# Altium PCB sm.PcbDoc
Units mm, origin at the board's own origin, x right, y up, seen from the top; angles counter-clockwise.
Board outline 113 x 128 mm, 2 copper layers (Top Layer, Bottom Layer); 43 components, 38 nets, 170 pads, 22 vias.
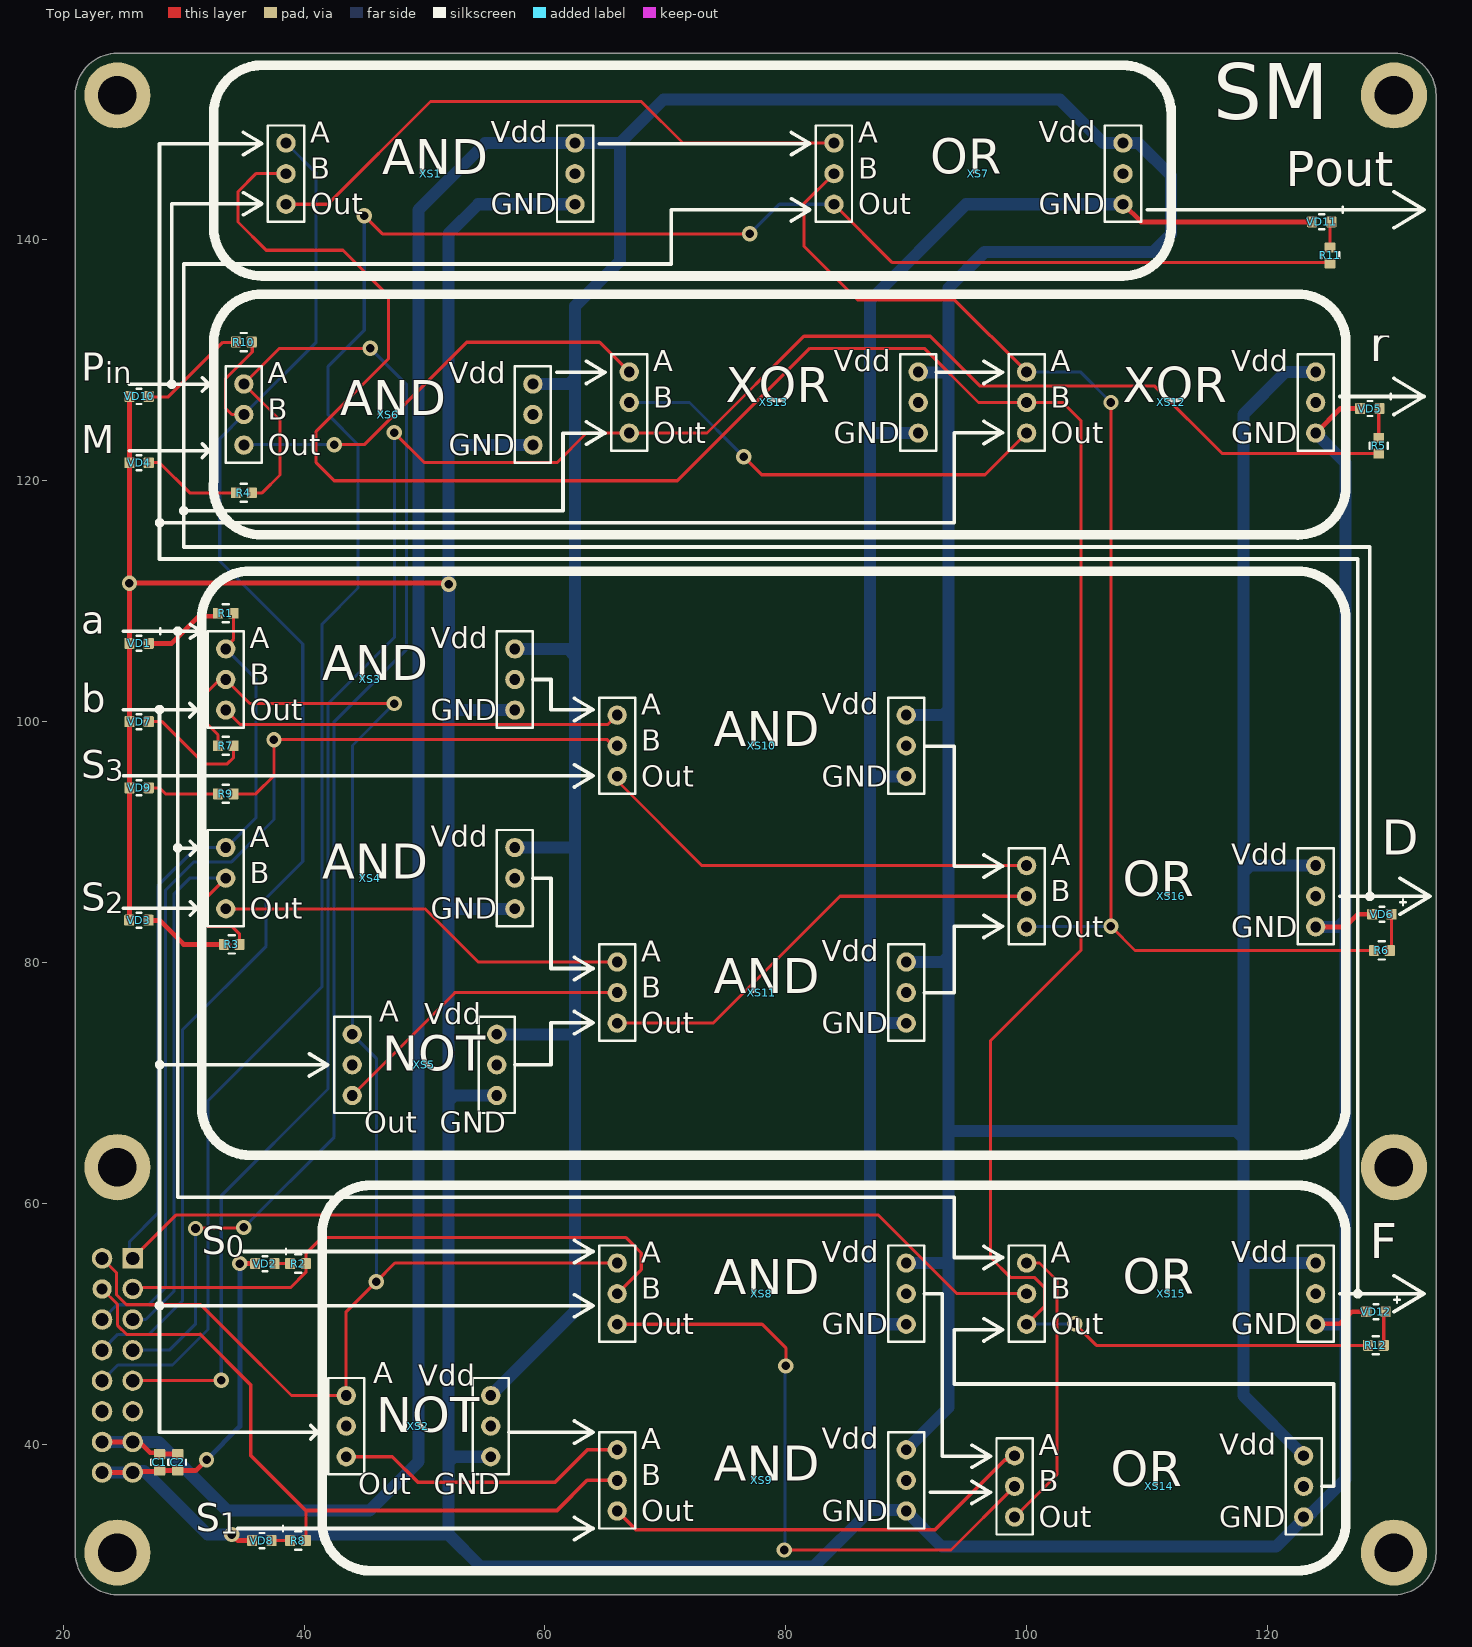
[diagram p0: Top Layer view]
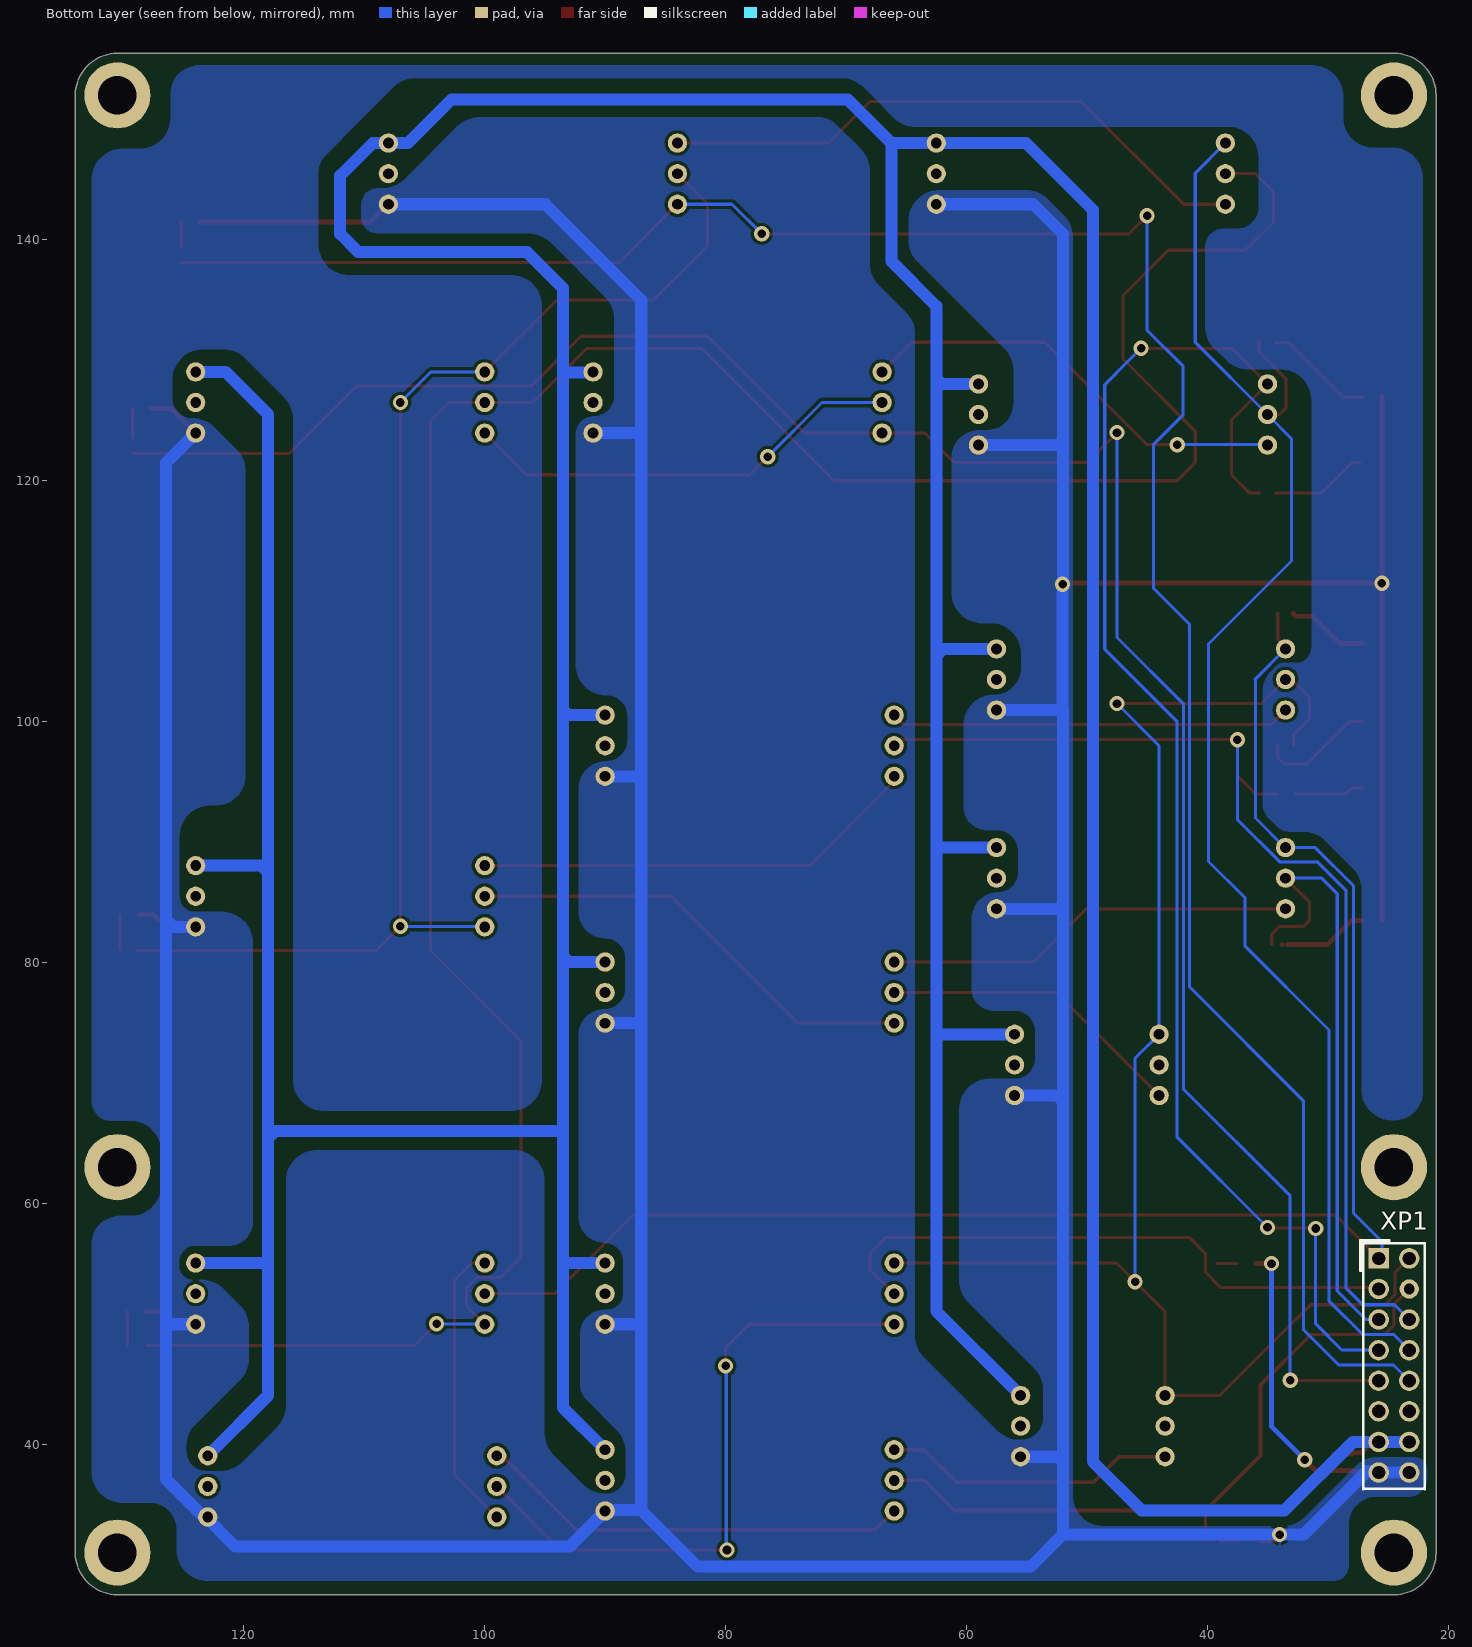
[diagram p1: Bottom Layer view, seen from below]

## Layer stack, top to bottom
Top Solder: solder mask 0.0102, Solder Resist, Dk 3.5
Top Layer: signal copper 0.0356
Dielectric 1: dielectric 0.32, FR-4, Dk 4.8
Bottom Layer: signal copper 0.0356
Bottom Solder: solder mask 0.0102, Solder Resist, Dk 3.5

## Board outline
24.5,27.5 cw(c24.5,31) 21,31 21,152 cw(c24.5,152) 24.5,155.5 120,155.5 130.5,155.5 cw(c130.5,152) 134,152 134,31 cw(c130.5,31) 130.5,27.5

## Design rules (kind name [scope] priority, off if disabled: settings)
Clearance [All] p1: gap=0.254 ignorepadtopadclearanceinfootprint=FALSE except(0: Arc-Hole Track-Hole SMDPad-Hole THPad-Hole Via-Hole Fill-Hole Poly-Hole Region-Hole Text-Hole)
ComponentClearance [All] p1: gap=0 collisioncheckmode=3 verticalgap=0 showdistances=TRUE
PolygonConnect [All] p1: connectstyle=Relief reliefconductorwidth=0.254 reliefentries=4 polygonreliefangle="90 Angle" airgapwidth=0.254
RoutingVias [All] p1: holewidth=0.711 width=1.27 viastyle="Through Hole" minholewidth=0.711 minwidth=1.27 maxholewidth=0.711 maxwidth=1.27
SolderMaskExpansion [All] p1: expansion=0.102 istentingtop=FALSE
Width [All] p1: maxlimit=5 minlimit=0.2 preferedwidth=0.4
29 further rules are at their usual default settings.

## Components (designator, comment, footprint, x,y, rotation, side; value= is the part's Value field where it differs from the comment)
C1 "10 мкФ ±* * * 0805, *" K10-79_1.6_0.8(0603) 28,38.5 r90 top value="10 мк"
C2 "1 мкФ ±* * * 0603, *" K10-79_1.6_0.8(0603) 29.5,38.5 r90 top value="1 мк"
R1 "1 кОм ±* 0603, *" P1-12-0.1(0603) 33.5,109 r180 top value="1 к"
R2 "1 кОм ±* 0603, *" P1-12-0.1(0603) 39.5,55 r180 top value="1 к"
R3 "1 кОм ±* 0603, *" P1-12-0.1(0603) 34,81.5 r180 top value="1 к"
R4 "1 кОм ±* 0603, *" P1-12-0.1(0603) 35,119 r180 top value="1 к"
R5 "1 кОм ±* 0603, *" P1-12-0.1(0603) 129.235,122.911 r90 top value="1 к"
R6 "1 кОм ±* 0603, *" P1-12-0.1(0603) 129.5,81 r0 top value="1 к"
R7 "1 кОм ±* 0603, *" P1-12-0.1(0603) 33.5,98 r0 top value="1 к"
R8 "1 кОм ±* 0603, *" P1-12-0.1(0603) 39.5,32 r180 top value="1 к"
R9 "1 кОм ±* 0603, *" P1-12-0.1(0603) 33.5,94 r180 top value="1 к"
R10 "1 кОм ±* 0603, *" P1-12-0.1(0603) 35.001,131.521 r180 top value="1 к"
R11 "1 кОм ±* 0603, *" P1-12-0.1(0603) 125.197,138.709 r90 top value="1 к"
R12 "1 кОм ±* 0603, *" P1-12-0.1(0603) 129,48.209 r0 top value="1 к"
VD1 "VD - Светодиод" "LED 0603" 26.3,106.5 r180 top
VD2 "VD - Светодиод" "LED 0603" 36.75,55 r180 top
VD3 "VD - Светодиод" "LED 0603" 26.289,83.515 r180 top
VD4 "VD - Светодиод" "LED 0603" 26.3,121.5 r180 top
VD5 "VD - Светодиод" "LED 0603" 128.5,126 r180 top
VD6 "VD - Светодиод" "LED 0603" 129.5,84 r180 top
VD7 "VD - Светодиод" "LED 0603" 26.3,100 r180 top
VD8 "VD - Светодиод" "LED 0603" 36.5,32 r180 top
VD9 "VD - Светодиод" "LED 0603" 26.3,94.5 r180 top
VD10 "VD - Светодиод" "LED 0603" 26.3,127 r180 top
VD11 "VD - Светодиод" "LED 0603" 124.5,141.5 r180 top
VD12 "VD - Светодиод" "LED 0603" 129,51 r180 top
XP1 "XP - Вилка - х8" PLD-16Norm 24.5,44 r270 bottom
XS1 "Модуль AND" модуль_AND 38.5,145.5 r0 top
XS2 "Модуль NOT" модуль_NOT 43.5,41.5 r0 top
XS3 "Модуль AND" модуль_AND 33.5,103.5 r0 top
XS4 "Модуль AND" модуль_AND 33.5,87 r0 top
XS5 "Модуль NOT" модуль_NOT 44,71.5 r0 top
XS6 "Модуль AND" модуль_AND 35,125.5 r0 top
XS7 "Модуль OR" модуль_OR 84,145.5 r0 top
XS8 "Модуль AND" модуль_AND 66,52.5 r0 top
XS9 "Модуль AND" модуль_AND 66,37 r0 top
XS10 "Модуль AND" модуль_AND 66,98 r0 top
XS11 "Модуль AND" модуль_AND 66,77.5 r0 top
XS12 "Модуль XOR" модуль_XOR 100,126.5 r0 top
XS13 "Модуль XOR" модуль_XOR 67,126.5 r0 top
XS14 "Модуль OR" модуль_OR 99,36.5 r0 top
XS15 "Модуль OR" модуль_OR 100,52.5 r0 top
XS16 "Модуль OR" модуль_OR 100,85.5 r0 top

## Footprints (in the part's own frame and the unit in brackets; to place one, negate y for a bottom-side part, rotate by r counter-clockwise, add the part's x,y. Pads: shape width x height; smd on the part's side, far side on the other; paste and mask are expansions set on the pad)
K10-79_1.6_0.8(0603) [mm]
  rrect20% 0.85x0.95 smd mask+0.05: 1(-0.675,0) 2(0.675,0)
  silkscreen extent -0.2,-0.7 0.2,0.7, body extent -0.8,-0.42 0.84,0.43, height 0.41
"LED 0603" [mm]
  rrect20% 0.85x0.9 smd mask+0.05: 1(-0.8,0) 2(0.8,0)
  silkscreen extent -2,-1.25 0.2,0.63, body extent -0.8,-0.4 0.8,0.4, height 0.6
P1-12-0.1(0603) [mm]
  rrect20% 0.85x0.9 smd mask+0.05: 1(-0.65,0) 2(0.65,0)
  Top Layer pour cut-out: -0.225,0.4 0.225,0.4 0.225,-0.4 -0.225,-0.4
  silkscreen extent -0.25,-0.75 0.25,0.75, body extent -0.85,-0.4 0.85,0.4, height 0.56
PLD-16Norm [mm]
  rect 1.7x1.7 hole 1.1: 1(-11.43,-1.27)
  round 1.7 hole 1.1: 2(-11.43,1.27) 3(-8.89,-1.27) 5(-6.35,-1.27) 6(-6.35,1.27) 7(-3.81,-1.27) 8(-3.81,1.27) 9(-1.27,-1.27) 10(-1.27,1.27) 11(1.27,-1.27) 12(1.27,1.27) 13(3.81,-1.27) 14(3.81,1.27) 15(6.35,-1.27) 16(6.35,1.27)
  round 1.6 hole 0.9: 4(-8.89,1.27)
  silkscreen extent -12.95,-2.79 7.75,2.54
модуль_AND [mm]
  round 1.6 hole 0.9: 1(0,2.54) 2(0,0) 3(0,-2.54) 4(24,2.54) 5(24,0) 6(24,-2.54)
  silkscreen extent -1.5,-4 25.5,4, body extent -1.34,-3.91 25.2,3.71, height 8.55
модуль_NOT [mm]
  round 1.6 hole 0.9: 1(0,2.54) 2(0,0) 3(0,-2.54) 4(12,2.54) 5(12,0) 6(12,-2.54)
  silkscreen extent -1.5,-4 13.5,4, body extent -1.34,-3.91 13.2,3.71, height 8.55
модуль_OR [mm]
  round 1.6 hole 0.9: 1(0,2.54) 2(0,0) 3(0,-2.54) 4(24,2.54) 5(24,0) 6(24,-2.54)
  silkscreen extent -1.5,-4 25.5,4, body extent -1.34,-3.91 25.2,3.71, height 8.55
модуль_XOR [mm]
  round 1.6 hole 0.9: 1(0,2.54) 2(0,0) 3(0,-2.54) 4(24,2.54) 5(24,0) 6(24,-2.54)
  silkscreen extent -1.5,-4 25.5,4, body extent -1.34,-3.91 25.2,3.71, height 8.55

## Part data
C1: library part "C - Конденсатор", Package=0805
C2: library part "C - Конденсатор", Package=0603
R1 R2 R3 R4 R5 R6 R7 R8 R9 R10 R11 R12: library part "R - Резистор", Package=0603
VD1 VD2 VD3 VD4 VD5 VD6 VD7 VD8 VD9 VD10 VD11 VD12: Package=0603
XP1: library part "XP - розетка- х16", 9=r
XS1 XS3 XS4 XS6 XS8 XS9 XS10 XS11: "модуль AND", Package=Case-AND
XS2 XS5: "модуль NOT", Package=Case-NOT
XS7 XS14 XS15 XS16: "модуль OR", Package=Case-OR
XS12 XS13: "модуль XOR", Package=Case-XOR

## Free pads (board coordinates)
  round 5.5 hole 3.2: M1(24.5,31) M1(24.5,63) M1(24.5,152) M1(130.5,31) M1(130.5,63) M1(130.5,152)

## Via types
v1: diameter 1.27, hole 0.711, Top Layer to Bottom Layer, tented both sides, 22 vias

## Nets (pads, with @x,y where several pads share a name; then routed paths per layer and width w, separated by ;. In a path a pad name is that pad's centre, name@x,y a point inside that pad or via, vN(x,y) a via of type N, cw(c..) or ccw(c..) an arc to the next point about the centre after c; other vN are vias at no path point)
a: R1.1 XP1.1 XS3.1 XS4.1 XS15.2 | length 139.2
  Top Layer w0.254: XP1.1 29.356,59.016 87.694,59.016 94.21,52.5 XS15.2 ; XS3.1 33.5,106.2 34.15,106.85 R1.1
  Bottom Layer w0.254: XP1.1 25.5,55.7 25.5,56.818 27.864,59.182 27.864,86.364 31.04,89.54 XS4.1 33.54,89.54 36,92 36,103.5 36.02,103.52 XS3.1
b: R7.1 XP1.2 XS2.1 XS3.2 XS5.1 XS8.1 | length 128.6
  Top Layer w0.25: XP1.2 24.409,54.251 24.409,52.424 25.252,51.581 31.419,51.581 34,49
  Top Layer w0.254: R7.1 32.85,98.9 31.5,100.25 31.5,102 32.742,103.242 33.242,103.242 XS3.2 35.5,101.5 v1(47.5,101.5) ; 34,49 38.96,44.04 XS2.1 43.5,51 v1(46,53.5) 47.54,55.04 XS8.1
  Bottom Layer w0.254: XS5.1 46,72.04 v1(46,53.5) ; 44.018,74.87 44.018,98.018 v1(47.5,101.5)
D: R6.1 XS7.2 XS12.1 XS16.3 | length 111.1
  Top Layer w0.254: XS7.2 81.5,143 81.5,139.5 86,135 94.04,135 XS12.1 ; v1(107,126.5) v1(107,83) 109,81 R6.1
  Bottom Layer w0.254: XS16.3 100.04,83 v1(107,83) ; XS12.1 104.46,129.04 v1(107,126.5)
D_AND_G1: XS3.3 XS10.1 | length 33.3
  Top Layer w0.25: XS3.3 34.679,99.781 65.241,99.781 XS10.1
D_AND_G2: XS4.3 XS11.1 | length 34.3
  Top Layer w0.254: XS4.3 50.04,84.46 54.46,80.04 XS11.1
D_AND_G3: XS10.3 XS16.1 | length 37.3
  Top Layer w0.25: XS10.3 66,95.095 66.391,94.704 66.391,94.689 73.04,88.04 XS16.1
D_AND_G4: XS11.3 XS16.2 | length 38.4
  Top Layer w0.254: XS11.3 73.96,74.96 84.5,85.5 XS16.2
D_NOT_G1: XS5.3 XS11.2 | length 25.6
  Top Layer w0.254: XS5.3 52.5,77.46 52.5,77.5 XS11.2
F: R12.1 XS1.2 XS12.2 XS15.3 | length 220.3
  Top Layer w0.254: XS1.2 36,145.5 34.508,144.008 34.508,141.492 36.859,139.141 43.231,139.141 47,135.372 47,130.109 41,124.109 41,121.5 42.5,120 71,120 82,131 91.5,131 96,126.5 XS12.2 103,126.5 104.5,125 104.5,81 97,73.5 97,55.5 98.641,53.859 100.641,53.859 101.5,53 101.5,51.46 XS15.3 ; v1(104,50) 105.791,48.209 R12.1@128.077,48.209
  Bottom Layer w0.254: XS15.3 100.04,50 v1(104,50)
F_AND_G1: XS9.3 XS14.1 | length 36.2
  Top Layer w0.3: XS9.3 67.567,32.893 92.393,32.893 98.186,38.686 98.294,38.686 98.648,39.04 XS14.1
F_AND_G2: XS8.3 XS14.2 | length 52.9
  Top Layer w0.254: XS8.3 78.04,49.96 80,48 v1(80,46.5) ; v1(79.883,31.217) 93.717,31.217 XS14.2
  Bottom Layer w0.254: v1(79.883,31.217) 79.941,31.275 79.941,46.441 v1(80,46.5)
F_NOT_G1: XS2.3 XS9.1 | length 24.5
  Top Layer w0.3: XS2.3 47.324,38.96 49.428,36.855 60.855,36.855 63.54,39.54 XS9.1
F_OR_G1: XS14.3 XS15.1 | length 24.2
  Top Layer w0.254: XS14.3 102.514,37.474 102.514,53.594 101.068,55.04 XS15.1
GND: C1.1 C2.1 VD1.2 VD2.2 VD3.2 VD4.2 VD5.2 VD6.2 VD7.2 VD8.2 VD9.2 VD10.2 VD11.2 VD12.2 XP1.15 XP1.16 XS1.6 XS2.6 XS3.6 XS4.6 XS5.6 XS6.6 XS7.6 XS8.6 XS9.6 XS10.6 XS11.6 XS12.6 XS13.6 XS14.6 XS15.6 XS16.6 | length 619
  Top Layer w0.4: XP1.16 25.52,37.65 25.608,37.738 27.913,37.738 C1.1 C2.1 ; VD3.2 25.5,83.526 VD7.2 VD1.2 ; VD1.2@25.5,106.525 v1(25.5,111.5) ; VD10.2 v1(25.5,111.5) ; C2.1@29.511,37.814 31.007,37.814 v1(31.902,38.71) ; v1(34,32.5) 34.5,32 VD8.2 ; v1(34.671,55) VD2.2 ; v1(52.019,111.404) 51.924,111.5 v1(25.5,111.5) ; XS7.6 108.04,142.96 109.5,141.5 VD11.2 ; XS15.6 124.04,50 126,50 127,51 VD12.2 ; XS16.6 126.46,82.96 127.5,84 VD6.2 ; XS12.6 126.04,126 VD5.2
  Bottom Layer w0.4: v1(31.902,38.71) 34.671,41.478 v1(34.671,55)
  Bottom Layer w1: XP1.16 XP1.15 25.642,37.778 26.722,37.778 32,32.5 52,32.5 ; XS2.6 52.46,38.96 52,38.5 ; XS5.6 52.46,68.96 52,68.5 ; XS4.6 52.04,84.46 52,84.5 ; XS3.6 52.04,100.96 ; XS6.6 52.04,122.96 52,123 ; XS1.6 54.46,142.96 52,140.5 52,123 ; XS9.6@89.933,34.527 87,34.527 ; XS9.6 92.96,31.5 120.702,31.5 123.462,34.26 123.643,34.26 126.46,37.077 126.46,49.96 ; XS8.6 87.04,49.96 87,50 ; XS11.6 87.04,74.96 87,75 ; XS10.6 87.04,95.46 87,95.5 ; XS13.6 87.04,123.96 87,124 ; XS7.6 94.96,142.96 87,135 87,124 ; XS15.6 126.46,49.96 ; XS16.6 125.874,82.96 126.46,83.546 ; XS12.6 126.46,121.5 126.46,83.546 ; 52,32.5 54.672,29.828 82.301,29.828 87,34.527 ; 52,32.5 52,38.5 ; 52,38.5 52,68.5 ; 52,68.5 52,84.5 ; 52,84.5 52,101 52.04,100.96 ; 52,123 52,111.424 v1(52.019,111.404) 52.04,111.384 52.04,100.96 ; 87,34.527 87,50 ; 87,50 87,75 ; 87,75 87,95.5 ; 87,95.5 87,124 ; 126.46,49.96 126.46,83.546
M: R4.1 XP1.7 XS6.1 | length 121.4
  Top Layer w0.25: XS6.1 37.998,125.042 37.998,120.472 36.526,119 R4.1
  Top Layer w0.254: v1(30.988,57.912) 31.032,57.956 34.956,57.956 v1(35,58) ; XS6.1 37.96,131 v1(45.5,131)
  Bottom Layer w0.254: XP1.7 28.81,47.81 31,50 31,57.9 v1(30.988,57.912) ; v1(35,58) 42.5,65.5 42.5,100 48.516,106.016 48.516,127.984 46.5,130 v1(45.5,131)
NetR1_2: R1.2 VD1.1 | length 6.8
  Top Layer w0.4: VD1.1 29,106.5 31.25,108.75 32.625,108.75 32.85,108.975 R1.2
NetR2_2: R2.2 VD2.1 | length 1.7
  Top Layer w0.254: VD2.1 R2.2 R2.2@39.2,55
NetR3_2: R3.2 VD3.1 | length 7.1
  Top Layer w0.4: VD3.1 27.104,83.5 27.3,83.5 28,83.5 30,81.5 R3.2
NetR4_2: R4.2 VD4.1 | length 8.1
  Top Layer w0.25: VD4.1@27.3,121.5 28,121.5 30.5,119 R4.2
NetR5_2: R5.2 VD5.1 | length 2.5
  Top Layer w0.254: R5.2 129.235,125.935 VD5.1
NetR6_2: R6.2 VD6.1 | length 3.1
  Top Layer w0.254: R6.2 130.3,81.15 VD6.1
NetR7_2: R7.2 VD7.1 | length 9.7
  Top Layer w0.254: VD7.1 28.219,100 31.725,96.495 33.63,96.495 34.15,97.015 R7.2
NetR8_2: R8.2 VD8.1 | length 1.5
  Top Layer w0.25: VD8.1 R8.2
NetR9_2: R9.2 VD9.1 | length 5.8
  Top Layer w0.254: VD9.1 28,94.5 28.5,94 R9.2@32.7,94
NetR10_2: R10.2 VD10.1 | length 9.2
  Top Layer w0.25: VD10.1@27.064,126.936 28.689,126.936 33.253,131.5 34.33,131.5 R10.2
NetR11_2: R11.2 VD11.1 | length 2.2
  Top Layer w0.254: R11.2 125.197,141.397 VD11.1
NetR12_2: R12.2 VD12.1 | length 2.9
  Top Layer w0.254: R12.2 129.65,50.85 VD12.1
P_AND_G1: XS1.3 XS7.1 | length 50.5
  Top Layer w0.254: XS1.3 41.96,142.96 50.5,151.5 68,151.5 71.46,148.04 XS7.1
Pin: R10.1 XP1.8 XS1.1 XS6.2 | length 124
  Top Layer w0.254: XS6.2 34,125.5 33.477,126.023 33.477,128.477 35.7,130.7 35.7,131.472 R10.1
  Bottom Layer w0.254: XP1.8 24.539,49.119 27.119,49.119 29.912,51.912 29.912,56.626 29.896,56.642 29.896,74.396 36.855,81.355 36.855,85.355 39.893,88.393 39.893,106.451 33,113.344 33,123.5 XS6.2 41,131.5 41,145.54 XS1.1
Pout: R11.1 XP1.10 XS7.3 | length 194.3
  Top Layer w0.254: v1(45,142) 46.5,140.5 v1(77,140.5) ; XS7.3 88.85,138.11 125.146,138.11 R11.1
  Bottom Layer w0.254: XP1.10 24.539,46.579 29.079,46.579 32.029,49.529 32.029,68.529 41.484,77.984 41.484,108.097 44.484,111.097 44.484,123 42,125.484 42,129.5 45,132.5 v1(45,142) ; v1(77,140.5) 79.46,142.96 XS7.3
r: R5.1 XP1.9 XS13.3 | length 183.2
  Top Layer w0.254: XP1.9 25.792,45.292 33.1,45.292 v1(33.122,45.314) ; v1(47.5,124) 50,121.5 61,121.5 63.46,123.96 XS13.3 73.46,123.96 81.5,132 92,132 96.141,127.859 110.641,127.859 116.239,122.261 R5.1
  Bottom Layer w0.254: v1(33.122,45.314) 33.122,60.622 41.992,69.492 41.992,101.492 47.492,106.992 47.492,123.992 v1(47.5,124)
r_AND_G1: XS6.3 XS13.1 | length 36.6
  Top Layer w0.254: v1(42.5,123) 45,123 53.5,131.5 64.54,131.5 XS13.1
  Bottom Layer w0.254: XS6.3 35.04,123 v1(42.5,123)
r_XOR_G1: XS12.3 XS13.2 | length 36.9
  Top Layer w0.254: v1(76.5,122) 78,120.5 96.54,120.5 XS12.3
  Bottom Layer w0.254: XS13.2 72,126.5 v1(76.5,122)
S0: R2.1 XP1.3 XS8.2 | length 49.7
  Top Layer w0.254: XP1.3 25.88,53 38.878,53 40.15,54.272 40.15,55.822 41.504,57.175 66.7,57.175 68,55.876 68,54.5 XS8.2
S1: R8.1 XP1.4 XS9.2 | length 58.4
  Top Layer w0.25: XP1.4 24.5,51.62 24.5,49.897 24.541,49.856 24.541,49.841 25.261,49.121 31.379,49.121
  Top Layer w0.254: R8.1 40.15,34.5
  Top Layer w0.3: 31.379,49.121 35.585,44.915 35.585,39.065 40.15,34.5 61,34.5 63.5,37 XS9.2
S2: R3.1 XP1.5 XS4.2 | length 51
  Top Layer w0.254: XS4.2 31.5,85 31.5,83.5 32,83 34,83 34.65,82.35 R3.1
  Bottom Layer w0.254: XP1.5 25.78,50.36 26.852,50.36 29.21,52.718 29.21,85.71 30.5,87 XS4.2
S3: R9.1 XP1.6 XS10.2 | length 93.1
  Top Layer w0.254: R9.1 36,94 37.5,95.5 v1(37.5,98.5) 65.178,98.5 65.678,98 XS10.2
  Bottom Layer w0.254: XP1.6 24.461,51.581 27.081,51.581 28.5,53 28.5,86 30.859,88.359 33.989,88.359 37.5,91.87 v1(37.5,98.5)
Vdd: C1.2 C2.2 XP1.13 XP1.14 XS1.4 XS2.4 XS3.4 XS4.4 XS5.4 XS6.4 XS7.4 XS8.4 XS9.4 XS10.4 XS11.4 XS12.4 XS13.4 XS14.4 XS15.4 XS16.4 | length 608.3
  Top Layer w0.4: XP1.14 XP1.13 ; XP1.13@25.769,40.191 26.309,40.191 27.213,39.287 27.888,39.287 C1.2 C2.2
  Bottom Layer w1: XP1.14 27.907,40.19 33.597,34.5 45.447,34.5 49.5,38.553 49.5,142.5 55.04,148.04 66.226,148.04 ; XS2.4 62.5,51.04 62.5,74.1 ; XS5.4 62.44,74.04 62.5,74.1 ; XS4.4 62.368,89.54 62.5,89.408 ; XS3.4 61.914,106.04 62.5,105.454 ; XS6.4 62.04,128.04 62.5,128.5 ; XS9.4 93.5,43.04 93.5,55.04 ; XS8.4 93.5,55.04 ; XS11.4 93.04,80.04 93.5,80.5 ; XS10.4 93.04,100.54 93.5,101 ; XS13.4 91.04,129 93.5,129 ; XS14.4 118,44.04 118,55.04 ; XS15.4 118,55.04 ; XS16.4 118.54,88.04 118,87.5 ; XS12.4 121.522,129.04 118,125.518 118,87.5 ; 62.5,74.1 62.5,89.408 ; 62.5,89.408 62.5,105.454 ; 62.5,105.454 62.5,128.5 ; 62.5,128.5 62.5,134.5 66.226,138.226 66.226,148.04 ; 66.226,148.04 69.835,151.648 102.768,151.648 106.377,148.04 109.287,148.04 112,145.327 112,140.5 110.5,139 96.5,139 93.5,136 93.5,129 ; 93.5,55.04 93.5,66 ; 93.5,66 93.5,80.5 ; 93.5,66 117.414,66 118,65.414 ; 93.5,80.5 93.5,101 ; 93.5,101 93.5,129 ; 118,55.04 118,65.414 ; 118,65.414 118,87.5
pads on no net: XP1.11 XP1.12 XS1.5 XS2.2 XS2.5 XS3.5 XS4.5 XS5.2 XS5.5 XS6.5 XS7.5 XS8.5 XS9.5 XS10.5 XS11.5 XS12.5 XS13.5 XS14.5 XS15.5 XS16.5

## Polygon pours and split planes (outlines as drawn)
GND on Bottom Layer "Bottom Layer-GND" (solid, remove dead copper, pour order 6): 238 vertices, not listed, extent 21.717,28.651 132.639,154.483

## Silkscreen, mask and mechanical layers (free items; w line width, h text height)
Top Overlay:
  drawing of 220 lines, arcs and shapes, not listed
  text "SM" at 115.5,148.5 h8
  text "Pout" at 121.5,143.5 h5
  text "r" at 128.5,129 h5
  text "P" at 21.5,127.5 h4
  text "in" at 23.5,127.5 h3
  text "M" at 21.5,121.5 h4
  text "a" at 21.5,106.5 h4
  text "b" at 21.5,100 h4
  text "S" at 21.5,94.5 h4
  text "3" at 23.5,94.5 h3
  text "D" at 129.5,88 h5
  text "S" at 21.5,83.5 h4
  text "2" at 23.5,83.5 h3
  text "S" at 31.5,55 h4
  text "0" at 33.5,55 h3
  text "F" at 128.5,54.5 h5
  text "S" at 31,32 h4
  text "1" at 33,32 h3
Mechanical 4:
  lines w0.4: 21,31 ccw(c24.5,31) 24.5,27.5 130.5,27.5 ccw(c130.5,31) 134,31 134,138.5 134,152 ccw(c130.5,152) 130.5,155.5 120,155.5 24.5,155.5 ccw(c24.5,152) 21,152 21,31

## Dimensions
130.5,31 to 130.5,152 on Mechanical 7
130.5,31 to 130.5,63 on Mechanical 7
24.5,31 to 24.5,63 on Mechanical 7
130.5,31 to 24.5,31 on Mechanical 7

## Text inside footprints (layer, text, board x,y; h text height)
XS1: Top Overlay "Vdd" at 55.5,147.531 h3; Top Overlay "GND" at 55.5,141.531 h3; Top Overlay "A" at 40.5,147.5 h3; Top Overlay "B" at 40.5,144.5 h3; Top Overlay "Out" at 40.5,141.531 h3; Top Overlay "AND" at 46.5,144.5 h5
XS2: Top Overlay "NOT" at 46,40.051 h5; Top Overlay "Out" at 44.5,35.281 h3; Top Overlay "A" at 45.75,44.5 h3; Top Overlay "GND" at 50.75,35.281 h3; Top Overlay "Vdd" at 49.5,44.281 h3
XS3: Top Overlay "AND" at 41.5,102.5 h5; Top Overlay "Out" at 35.5,99.531 h3; Top Overlay "B" at 35.5,102.5 h3; Top Overlay "A" at 35.5,105.5 h3; Top Overlay "GND" at 50.5,99.531 h3; Top Overlay "Vdd" at 50.5,105.531 h3
XS4: Top Overlay "Vdd" at 50.5,89.031 h3; Top Overlay "GND" at 50.5,83.031 h3; Top Overlay "A" at 35.5,89 h3; Top Overlay "B" at 35.5,86 h3; Top Overlay "Out" at 35.5,83.031 h3; Top Overlay "AND" at 41.5,86 h5
XS5: Top Overlay "GND" at 51.25,65.281 h3; Top Overlay "Out" at 45,65.281 h3; Top Overlay "NOT" at 46.5,70.051 h5; Top Overlay "Vdd" at 50,74.281 h3; Top Overlay "A" at 46.25,74.5 h3
XS6: Top Overlay "Vdd" at 52,127.531 h3; Top Overlay "GND" at 52,121.531 h3; Top Overlay "A" at 37,127.5 h3; Top Overlay "B" at 37,124.5 h3; Top Overlay "Out" at 37,121.531 h3; Top Overlay "AND" at 43,124.5 h5
XS7: Top Overlay "Vdd" at 101,147.531 h3; Top Overlay "GND" at 101,141.531 h3; Top Overlay "A" at 86,147.5 h3; Top Overlay "B" at 86,144.5 h3; Top Overlay "Out" at 86,141.531 h3; Top Overlay "OR" at 92,144.551 h5
XS8: Top Overlay "A" at 68,54.5 h3; Top Overlay "Vdd" at 83,54.531 h3; Top Overlay "B" at 68,51.5 h3; Top Overlay "AND" at 74,51.5 h5; Top Overlay "Out" at 68,48.531 h3; Top Overlay "GND" at 83,48.531 h3
XS9: Top Overlay "Vdd" at 83,39.031 h3; Top Overlay "GND" at 83,33.031 h3; Top Overlay "A" at 68,39 h3; Top Overlay "B" at 68,36 h3; Top Overlay "Out" at 68,33.031 h3; Top Overlay "AND" at 74,36 h5
XS10: Top Overlay "Vdd" at 83,100.031 h3; Top Overlay "GND" at 83,94.031 h3; Top Overlay "A" at 68,100 h3; Top Overlay "B" at 68,97 h3; Top Overlay "Out" at 68,94.031 h3; Top Overlay "AND" at 74,97 h5
XS11: Top Overlay "Vdd" at 83,79.531 h3; Top Overlay "GND" at 83,73.531 h3; Top Overlay "A" at 68,79.5 h3; Top Overlay "B" at 68,76.5 h3; Top Overlay "Out" at 68,73.531 h3; Top Overlay "AND" at 74,76.5 h5
XS12: Top Overlay "XOR" at 108,125.551 h5; Top Overlay "Out" at 102,122.531 h3; Top Overlay "B" at 102,125.5 h3; Top Overlay "A" at 102,128.5 h3; Top Overlay "GND" at 117,122.531 h3; Top Overlay "Vdd" at 117,128.531 h3
XS13: Top Overlay "Vdd" at 84,128.531 h3; Top Overlay "GND" at 84,122.531 h3; Top Overlay "A" at 69,128.5 h3; Top Overlay "B" at 69,125.5 h3; Top Overlay "Out" at 69,122.531 h3; Top Overlay "XOR" at 75,125.551 h5
XS14: Top Overlay "A" at 101,38.5 h3; Top Overlay "OR" at 107,35.551 h5; Top Overlay "B" at 101,35.5 h3; Top Overlay "Vdd" at 116,38.531 h3; Top Overlay "GND" at 116,32.531 h3; Top Overlay "Out" at 101,32.531 h3
XS15: Top Overlay "GND" at 117,48.531 h3; Top Overlay "OR" at 108,51.551 h5; Top Overlay "Out" at 102,48.531 h3; Top Overlay "B" at 102,51.5 h3; Top Overlay "Vdd" at 117,54.531 h3; Top Overlay "A" at 102,54.5 h3
XS16: Top Overlay "Vdd" at 117,87.531 h3; Top Overlay "GND" at 117,81.531 h3; Top Overlay "A" at 102,87.5 h3; Top Overlay "B" at 102,84.5 h3; Top Overlay "Out" at 102,81.531 h3; Top Overlay "OR" at 108,84.551 h5